# Altium PCB PCB1.PcbDoc
Units mil, origin at the board's own origin, x right, y up, seen from the top; angles counter-clockwise.
Board outline 3900 x 2900 mil, 4 copper layers (Top Layer, Internal Plane 1, Internal Plane 2, Bottom Layer); 28 components, 48 nets, 137 pads, 0 vias.
Unrouted connection lines stored in the file: 89.
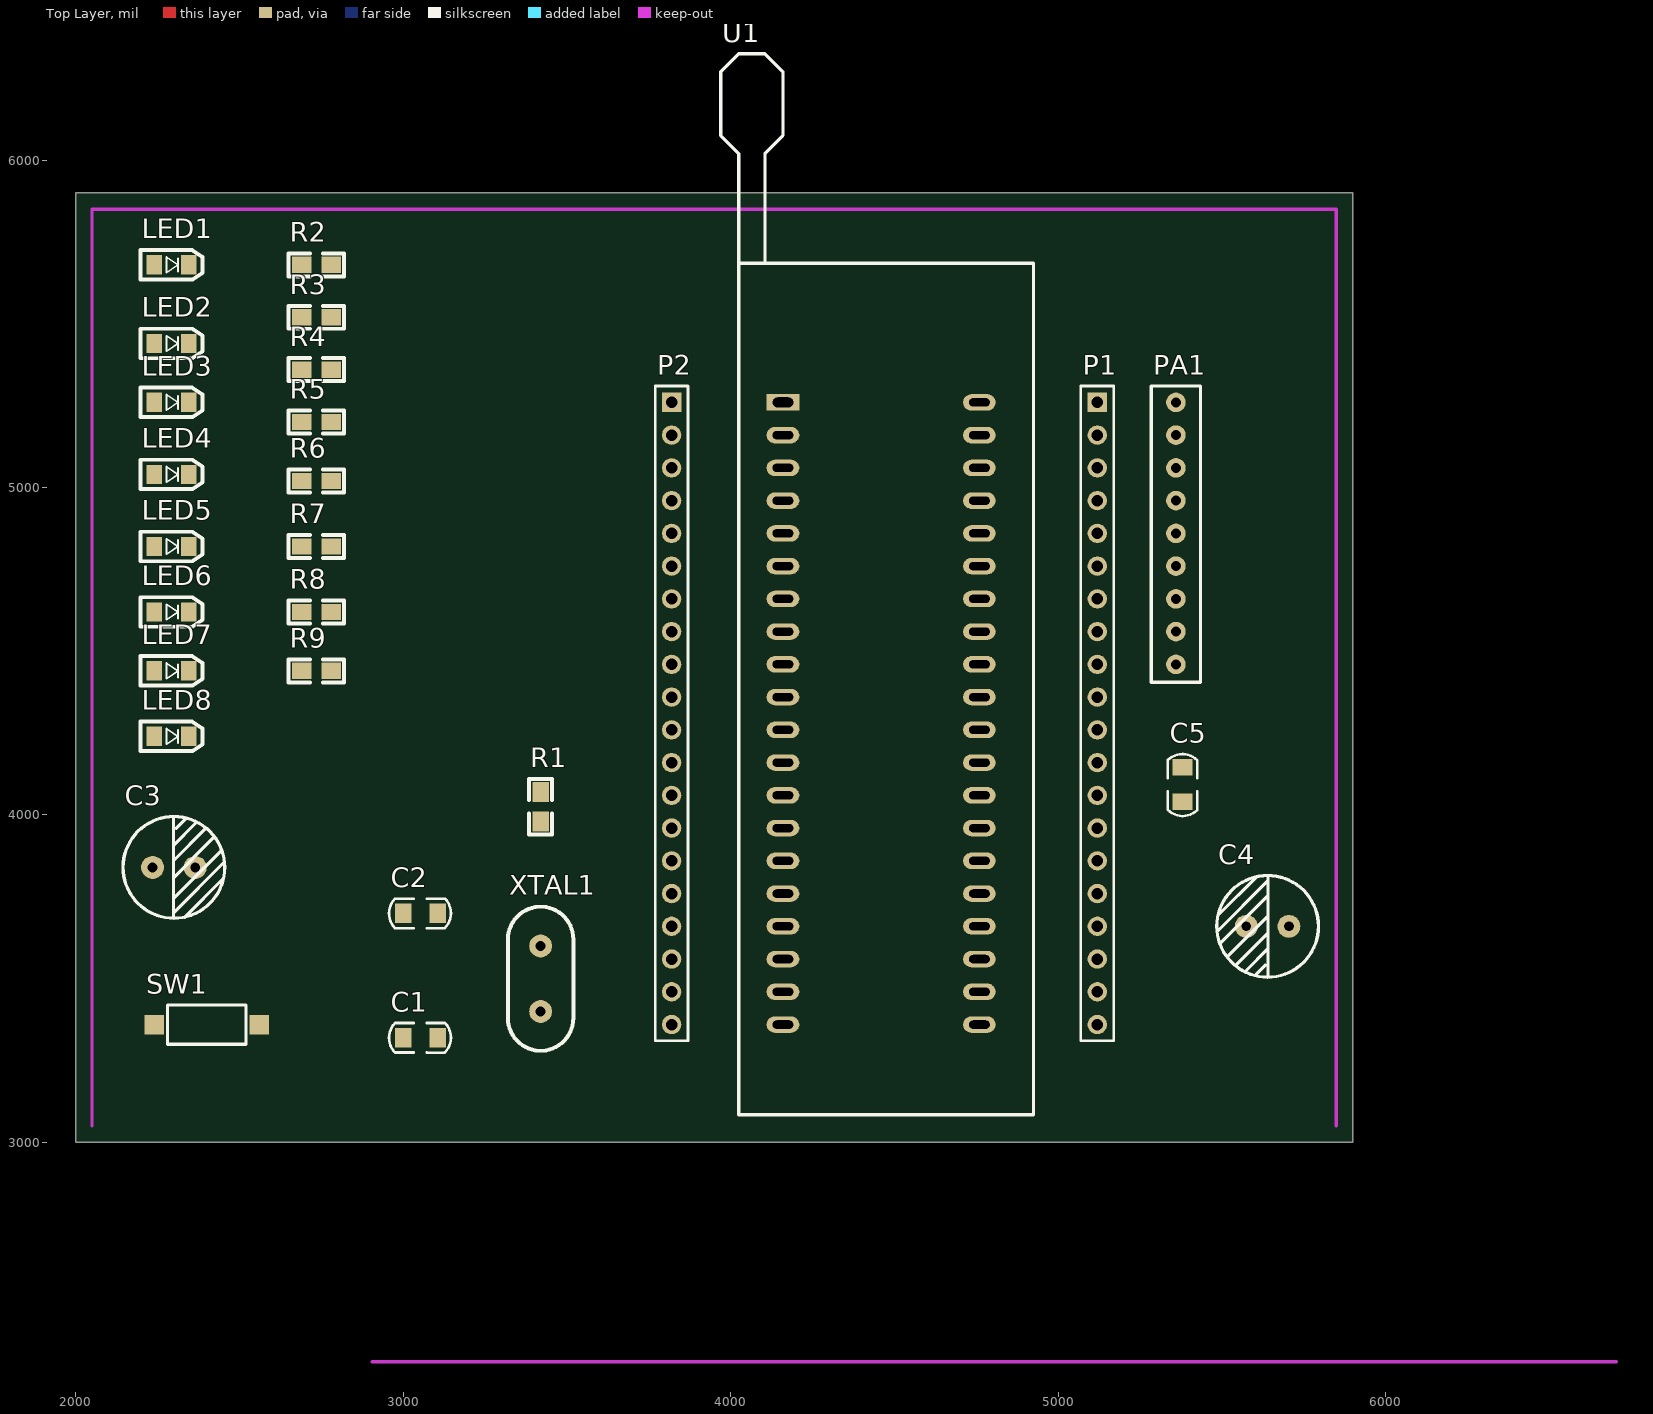
[diagram p0: Top Layer view]
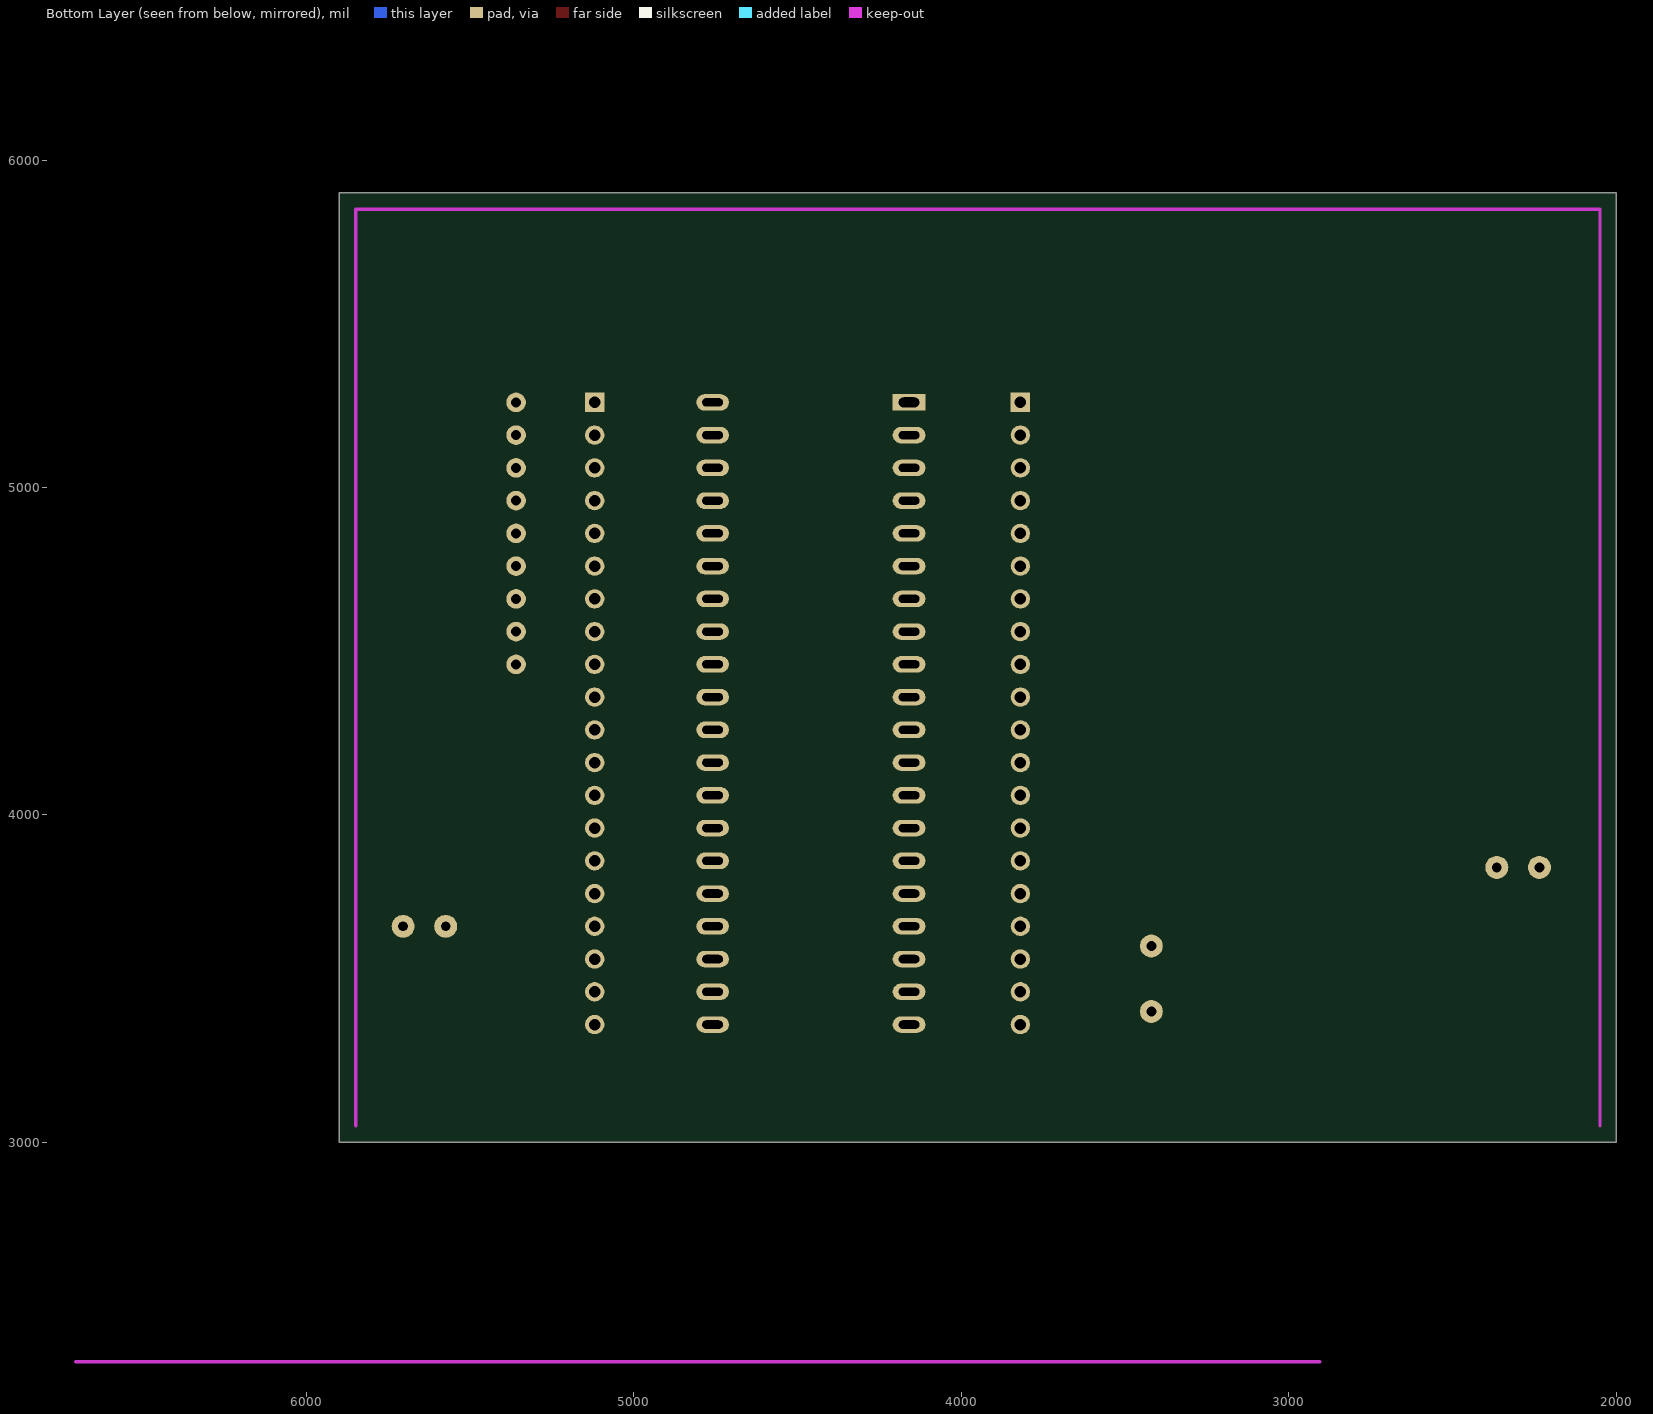
[diagram p1: Bottom Layer view, seen from below]
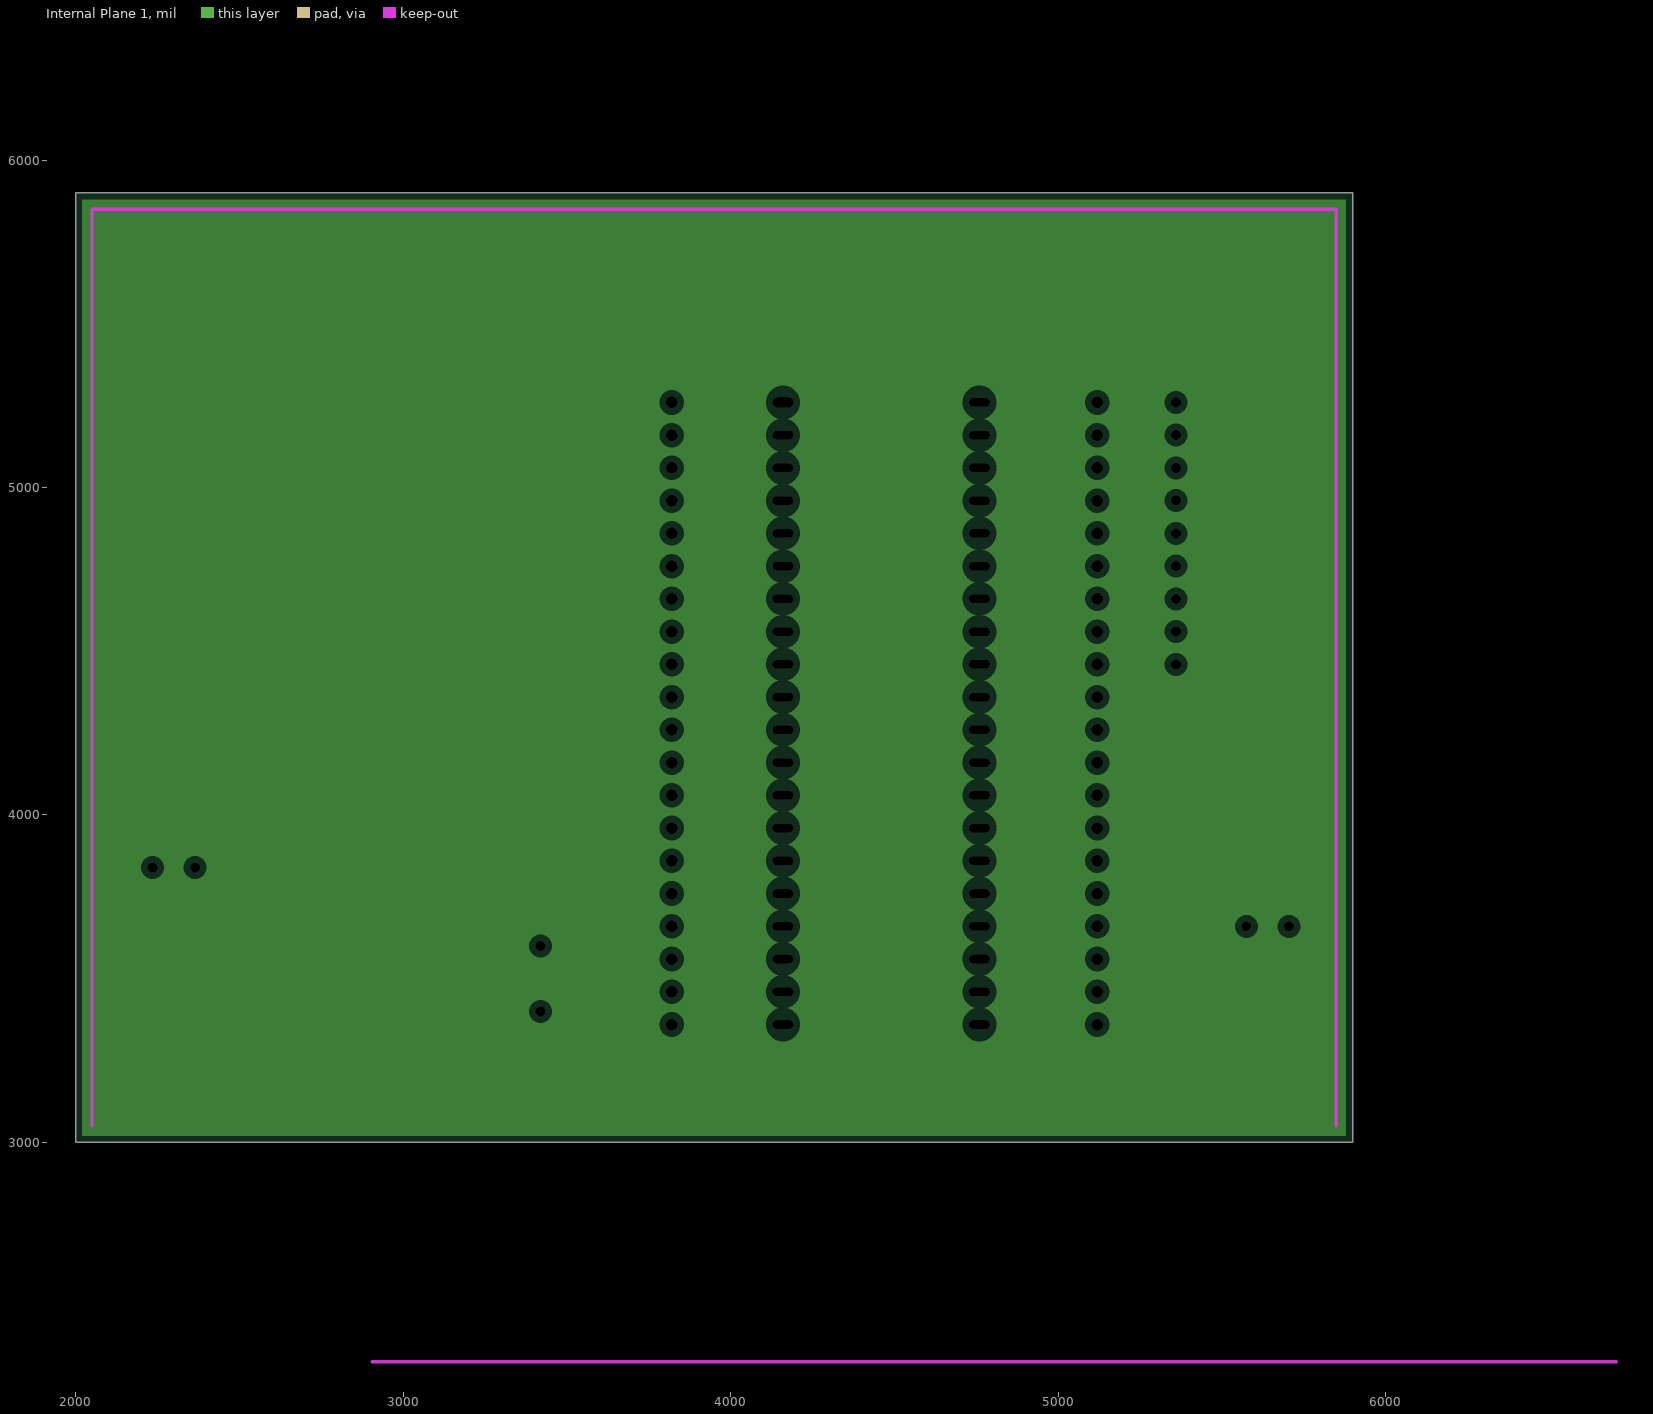
[diagram p2: Internal Plane 1, clearances drawn from the general rule]
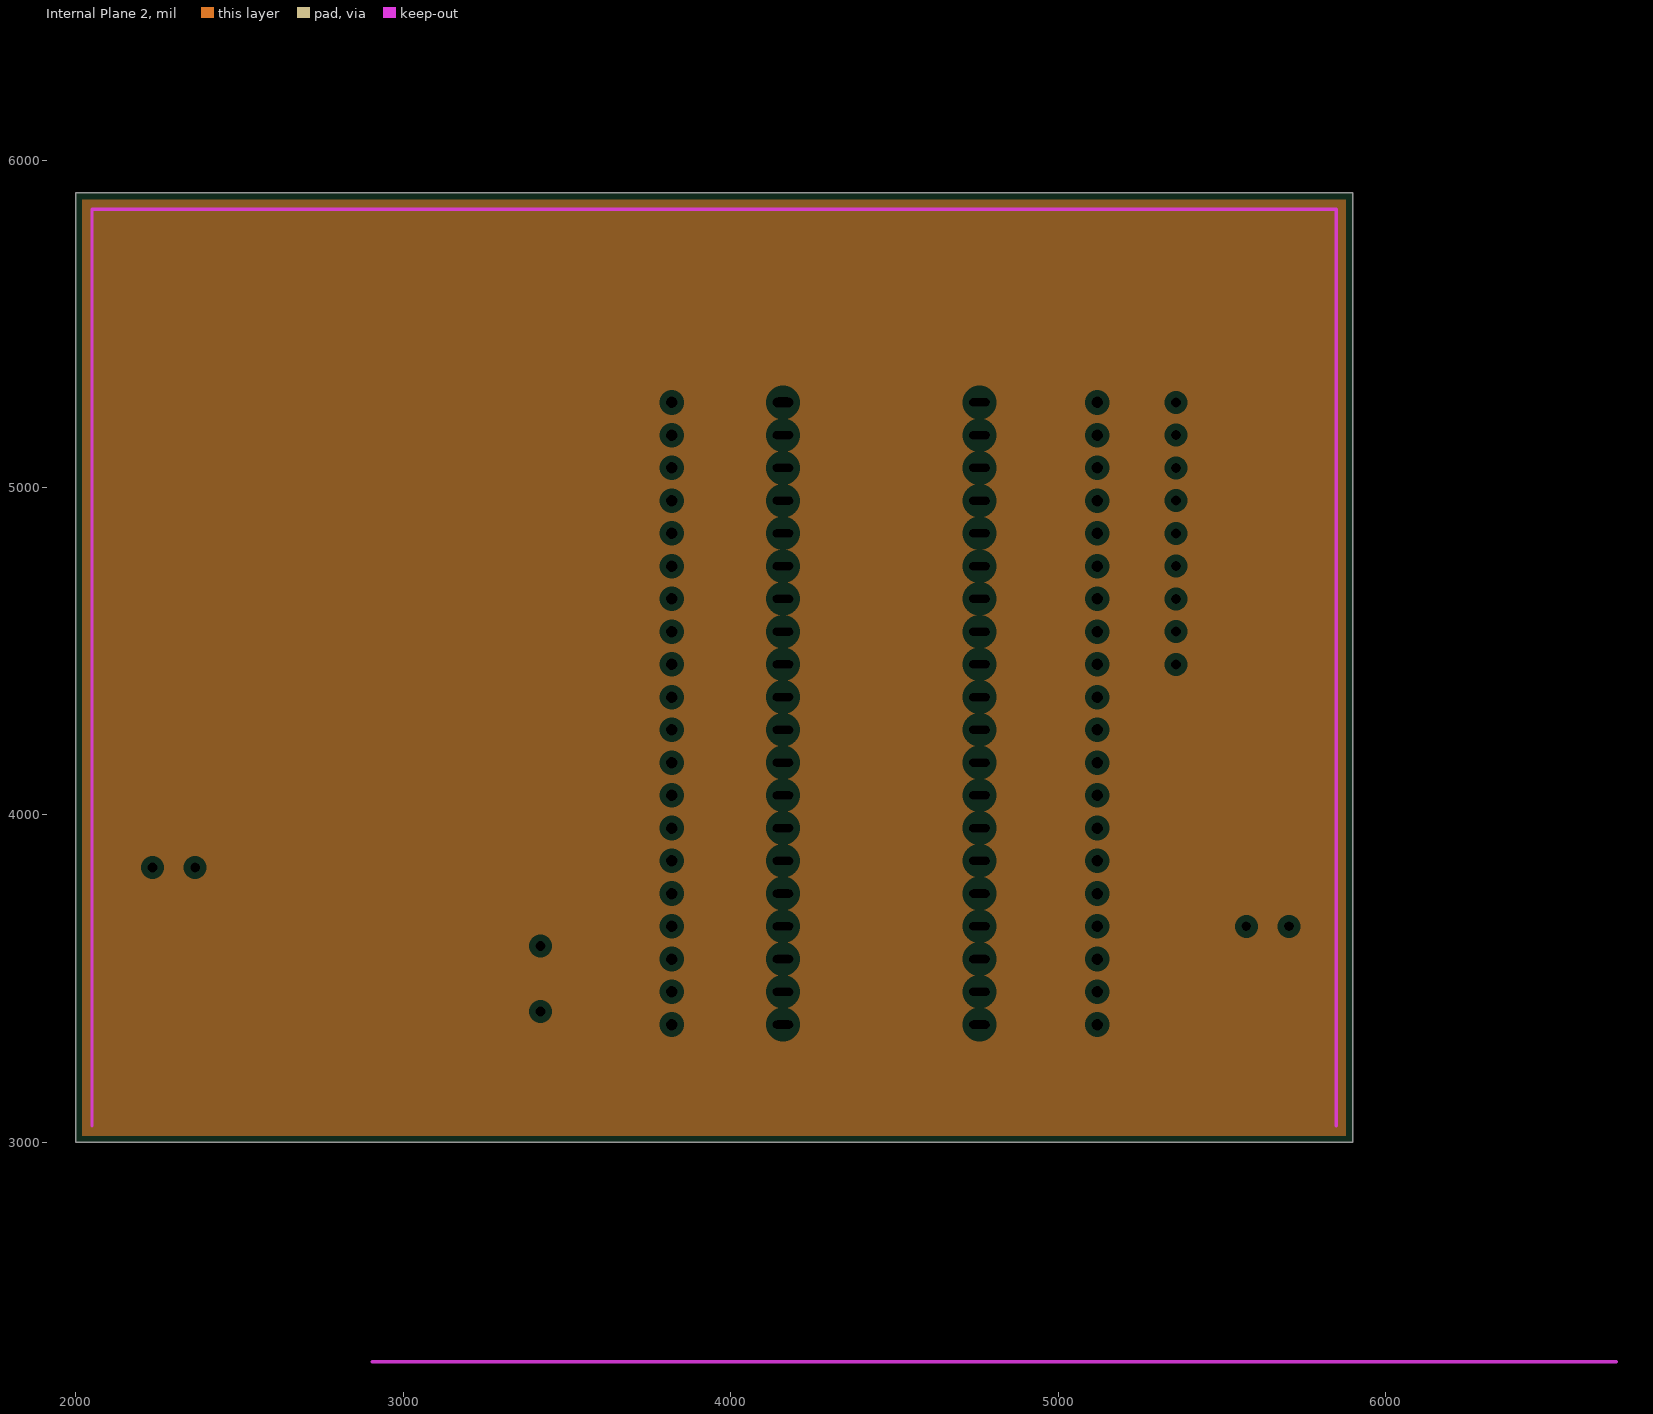
[diagram p3: Internal Plane 2, clearances drawn from the general rule]

## Layer stack, top to bottom
Top Layer: signal copper 1.4
Dielectric: dielectric 12.6, FR-4, Dk 4.8
Internal Plane 1: plane copper 1.4
Dielectric: dielectric 12.6, FR-4, Dk 4.8
Internal Plane 2: plane copper 1.4
Dielectric: dielectric 12.6, FR-4, Dk 4.8
Bottom Layer: signal copper 1.4

## Board outline
2000,3000 5900,3000 5900,5900 2000,5900

## Design rules (kind name [scope] priority, off if disabled: settings)
Clearance [All] p1: gap=8
PlaneClearance [All] p1: clearance=20
PlaneConnect [All] p1: planeconnectstyle=Relief reliefexpansion=20 reliefentries=4 reliefconductorwidth=10 reliefairgap=10
PolygonConnect [All] p1: connectstyle=Relief reliefconductorwidth=10 reliefentries=4 polygonreliefangle="90 Angle"
RoomDefinition Sheet1 [InComponentClass('Sheet1')] p1: confinementstyle=ConfineIn formatcopy=TRUE lockcomponents=FALSE outline 1185,-730 8540,-730 8540,2635 1185,2635
RoutingVias [All] p1: holewidth=25 width=40 viastyle="Through Hole" minholewidth=28 minwidth=50 maxholewidth=28 maxwidth=50
SilkscreenOverComponentPads [All] p1: minsilkscreentomaskgap=10
SolderMaskExpansion [All] p1: expansion=4
Width [All] p1: maxlimit=8 minlimit=8 preferedwidth=8
25 further rules are at their usual default settings.

## Components (designator, comment, footprint, x,y, rotation, side; value= is the part's Value field where it differs from the comment)
C1 "22" 0805C 3000,3320 r0 top
C2 "22" 0805C 3000,3700 r0 top
C3 "CAPD" RB470U 2300,3840 r0 top
C4 "CAPD" RB470U 5640,3660 r180 top (schematic designator C?)
C5 "Cap Semi" 0805C 5380,4040 r90 top
LED1 "LED" 0805-LED 2240,5680 r180 top
LED2 "LED" 0805-LED 2240,5440 r180 top
LED3 "LED" 0805-LED 2240,5260 r180 top
LED4 "LED" 0805-LED 2240,5040 r180 top
LED5 "LED" 0805-LED 2240,4820 r180 top
LED6 "LED" 0805-LED 2240,4620 r180 top
LED7 "LED" 0805-LED 2240,4440 r180 top
LED8 "LED" 0805-LED 2240,4240 r180 top
P1 "Header 20" HDR1X20 5120,5260 r270 top
P2 "Header 20" HDR1X20 3820,5260 r270 top
PA1 "DIP9" DIP9 5360,5260 r0 top
R1 "10k" 0805 3420,3980 r90 top
R2 "10k" 0805 2780,5680 r180 top
R3 "10k" 0805 2780,5520 r180 top
R4 "10k" 0805 2780,5360 r180 top
R5 "10k" 0805 2780,5200 r180 top
R6 "10k" 0805 2780,5020 r180 top
R7 "10k" 0805 2780,4820 r180 top
R8 "10k" 0805 2780,4620 r180 top
R9 "10k" 0805 2780,4440 r180 top
SW1 "SW" SWD 2560,3360 r180 top
U1 "AT89C51" DIP40紧锁座 4160,5260 r0 top
XTAL1 "CRYSTAL" XTAL 3420,3500 r270 top

## Footprints (in the part's own frame and the unit in brackets; to place one, negate y for a bottom-side part, rotate by r counter-clockwise, add the part's x,y. Pads: shape width x height; smd on the part's side, far side on the other; paste and mask are expansions set on the pad)
0805 [mil]
  rect 60x50 smd: 1(0,0) 2(90,0)
  silkscreen extent -40,-35 130,35
0805-LED [mm]
  rect 1.2x1.5 smd: 1(0,0) 2(-2.686,0)
  silkscreen extent -3.76,-1.14 1.07,1.14
0805C [mil]
  rect 50x60 smd: 1(0,0) 2(105.71,-0.31)
  silkscreen extent -43,-45 146,45
DIP9 [mil]
  round 60 hole 30: 1(0,0) 2(0,-100) 3(0,-200) 4(0,-300) 5(0,-400) 6(0,-500) 7(0,-600) 8(0,-700) 9(0,-800)
  silkscreen extent -75,-855 75,50
DIP40紧锁座 [mil]
  rect 100x50 hole 30 slot 62.99 at 0 deg: 1(0,0)
  oval 100x50 hole 25 slot 62.99 at 0 deg: 2(0,-100) 3(0,-200) 4(0,-300) 5(0,-400) 6(0,-500) 7(0,-600) 8(0,-700) 9(0,-800) 10(0,-900) 11(0,-1000) 12(0,-1100) 13(0,-1200) 14(0,-1300) 15(0,-1400) 16(0,-1500) 17(0,-1600) 18(0,-1700) 19(0,-1800) 20(0,-1900) 21(600,-1900) 22(600,-1800) 23(600,-1700) 24(600,-1600) 25(600,-1500) 26(600,-1400) 27(600,-1300) 28(600,-1200) 29(600,-1100) 30(600,-1000) 31(600,-900) 32(600,-800) 33(600,-700) 34(600,-600) 35(600,-500) 36(600,-400) 37(600,-300) 38(600,-200) 39(600,-100) 40(600,0)
  silkscreen extent -190,-2175 765,1065
HDR1X20 [mm] "Connector; Header; 20 Position"
  rect 1.5x1.5 hole 0.9: 1(0,0)
  round 1.5 hole 0.9: 2(2.54,0) 3(5.08,0) 4(7.62,0) 5(10.16,0) 6(12.7,0) 7(15.24,0) 8(17.78,0) 9(20.32,0) 10(22.86,0) 11(25.4,0) 12(27.94,0) 13(30.48,0) 14(33.02,0) 15(35.56,0) 16(38.1,0) 17(40.64,0) 18(43.18,0) 19(45.72,0) 20(48.26,0)
  silkscreen extent -1.27,-1.27 49.53,1.27
RB470U [mil]
  round 70 hole 30: 1(-65,0) 2(65,0)
  silkscreen extent -155,-155 155,155
SWD [mil]
  rect 60x60 smd: 1(-0.4,0.5) 2(319.6,0.5)
  silkscreen extent 40,-59 280,61
XTAL [mil]
  round 70 hole 30: 1(-100,0) 2(100,0)
  silkscreen extent -220,-100 220,100

## Part data
C1 C2: library part CAP, "C"
C5: "Capacitor (Semiconductor SIM Model)"
P1 P2: "Header, 20-Pin"
R1 R2 R3 R4 R5 R6 R7 R8 R9: library part R1, "R?"

## Nets (pads, with @x,y where several pads share a name; then routed paths per layer and width w, separated by ;. In a path a pad name is that pad's centre, name@x,y a point inside that pad or via, vN(x,y) a via of type N, cw(c..) or ccw(c..) an arc to the next point about the centre after c; other vN are vias at no path point)
LED1: P2.1 R2.1 U1.1
LED2: P2.2 R3.1 U1.2
LED3: P2.3 R4.1 U1.3
LED4: P2.4 R5.1 U1.4
LED5: P2.5 R6.1 U1.5
LED6: P2.6 R7.1 U1.6
LED7: P2.7 R8.1 U1.7
LED8: P2.8 R9.1 U1.8
NetLED1_2: LED1.2 R2.2
NetLED2_2: LED2.2 R3.2
NetLED3_2: LED3.2 R4.2
NetLED4_2: LED4.2 R5.2
NetLED5_2: LED5.2 R6.2
NetLED6_2: LED6.2 R7.2
NetLED7_2: LED7.2 R8.2
NetLED8_2: LED8.2 R9.2
NetP1_10: P1.10 U1.31
NetP1_11: P1.11 U1.30
NetP1_12: P1.12 U1.29
NetP1_13: P1.13 U1.28
NetP1_14: P1.14 U1.27
NetP1_15: P1.15 U1.26
NetP1_16: P1.16 U1.25
NetP1_17: P1.17 U1.24
NetP1_18: P1.18 U1.23
NetP1_19: P1.19 U1.22
NetP1_20: P1.20 U1.21
NetP2_10: P2.10 U1.10
NetP2_11: P2.11 U1.11
NetP2_12: P2.12 U1.12
NetP2_13: P2.13 U1.13
NetP2_14: P2.14 U1.14
NetP2_15: P2.15 U1.15
NetP2_16: P2.16 U1.16
NetP2_17: P2.17 U1.17
NetP2_18: P2.18 U1.18
P00: P1.2 PA1.2 U1.39
P01: P1.3 PA1.3 U1.38
P02: P1.4 PA1.4 U1.37
P03: P1.5 PA1.5 U1.36
P04: P1.6 PA1.6 U1.35
P05: P1.7 PA1.7 U1.34
P06: P1.8 PA1.8 U1.33
P07: P1.9 PA1.9 U1.32
RST: C3.2 P2.9 R1.2 SW1.1 U1.9
VCC: C3.1 C4.1 C5.2 LED1.1 LED2.1 LED3.1 LED4.1 LED5.1 LED6.1 LED7.1 LED8.1 P1.1 PA1.1 SW1.2 U1.40
X1: C1.2 P2.19 U1.19 XTAL1.2
X2: C1.1 C2.1 C2.2 C4.2 C5.1 P2.20 R1.1 U1.20 XTAL1.1

## Polygon pours and split planes (outlines as drawn)
no net on Internal Plane 1 (split plane): 5900,3000 2000,3000 2000,5900 5900,5900
no net on Internal Plane 2 (split plane): 5900,3000 2000,3000 2000,5900 5900,5900

## Keep-outs
Keep-Out Layer:
  lines w10: 2050,3050 2050,5850 5850,5850 5850,3050 ; 2905,2330 6705,2330

## Silkscreen, mask and mechanical layers (free items; w line width, h text height)
Drill Drawing:
  text ".LEGEND" at 1340,-590 h60
  text "Drill Drawing." at 1340,-690 h60

## Dimensions
2905,2330 to 6705,2330 on Mechanical 1
2050,3050 to 2050,5850 on Mechanical 1